# Altium PCB Altium-USBMETER-V1.5-Design-unverified.pcbdoc (part 1 of 2)
Units mm, origin at the board's own origin, x right, y up, seen from the top; angles counter-clockwise.
Board outline 73.46 x 110.88 mm, 4 copper layers (Top Layer, Inner1, Inner2, Bottom Layer); 47 components, 49 nets, 284 pads, 317 vias.
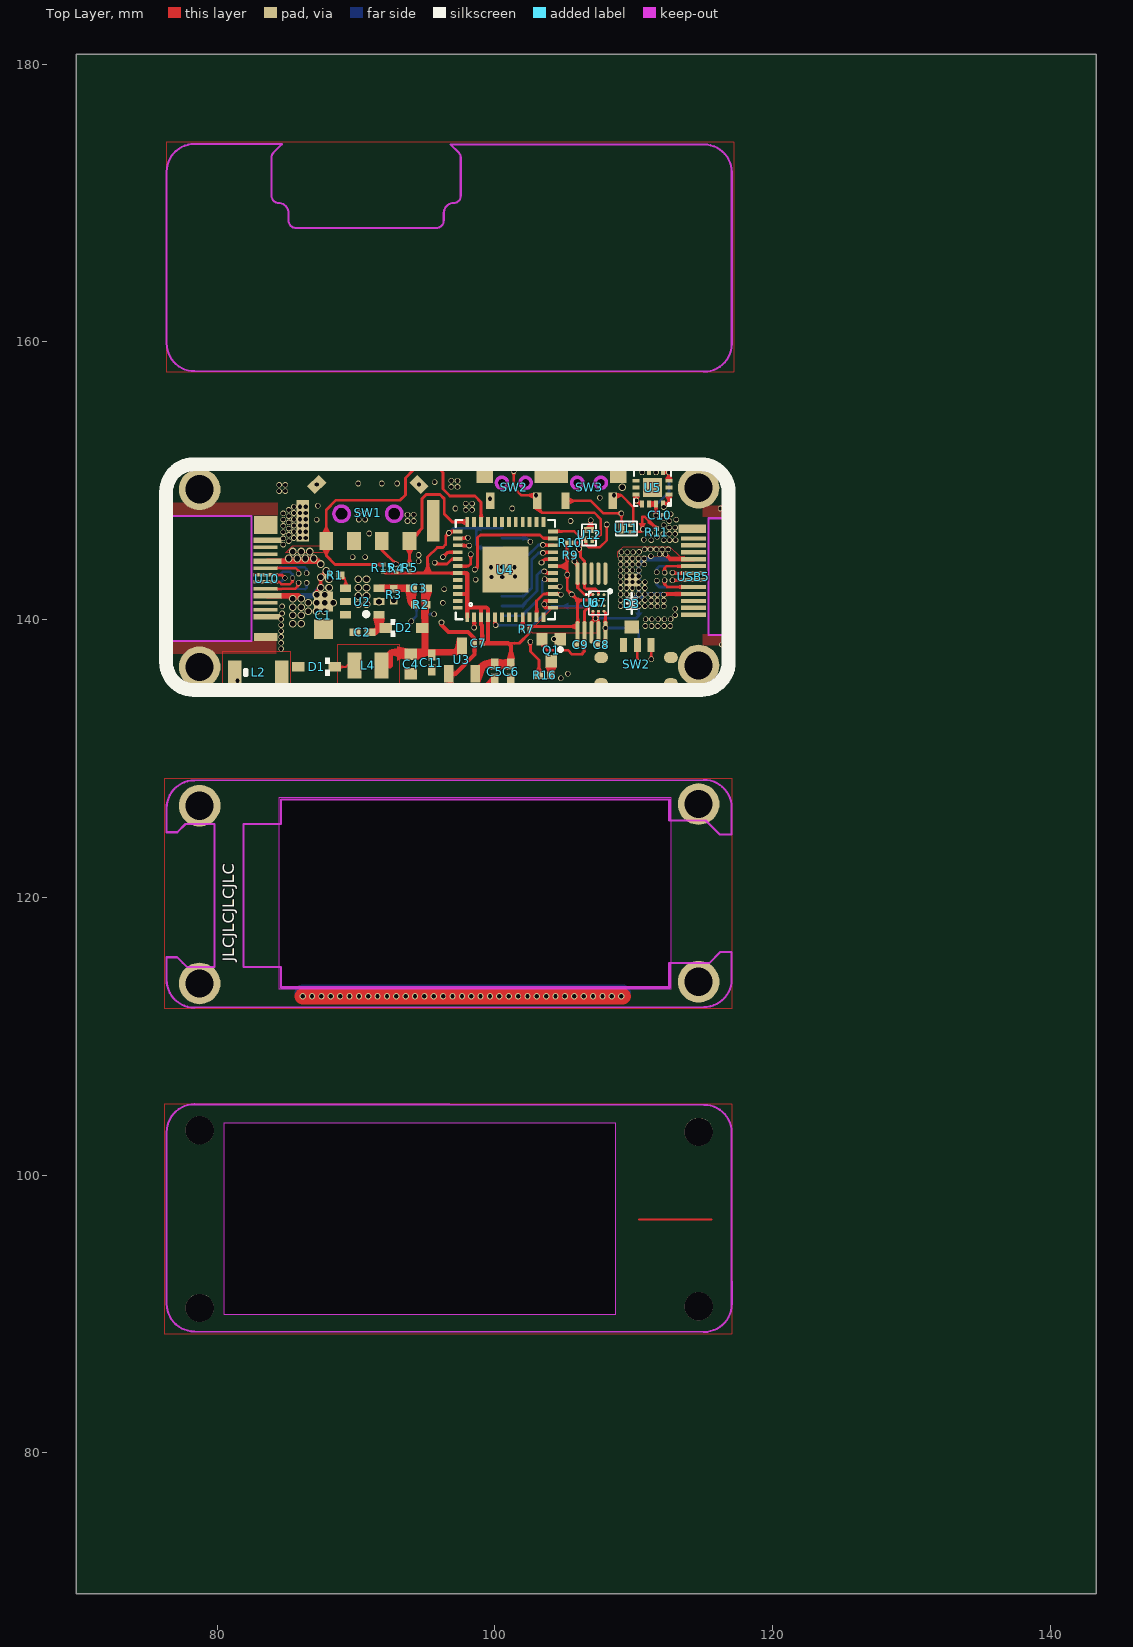
[diagram p0: Top Layer view]
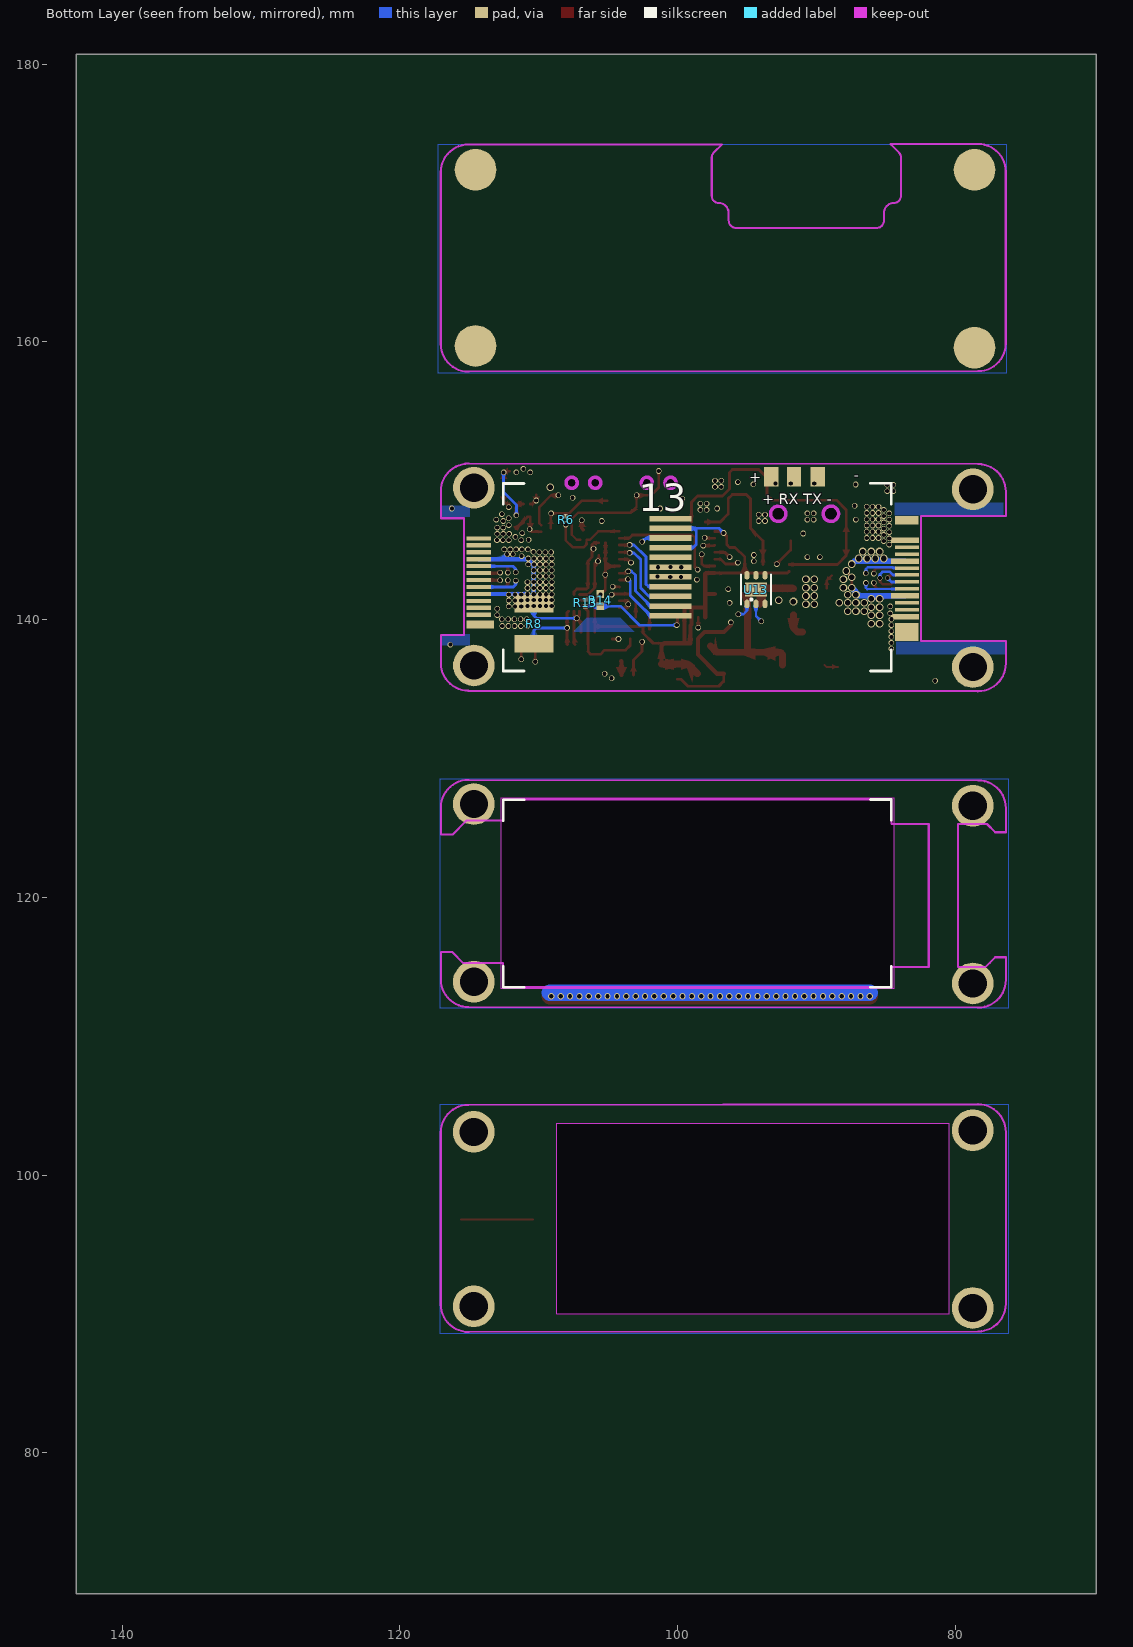
[diagram p1: Bottom Layer view, seen from below]
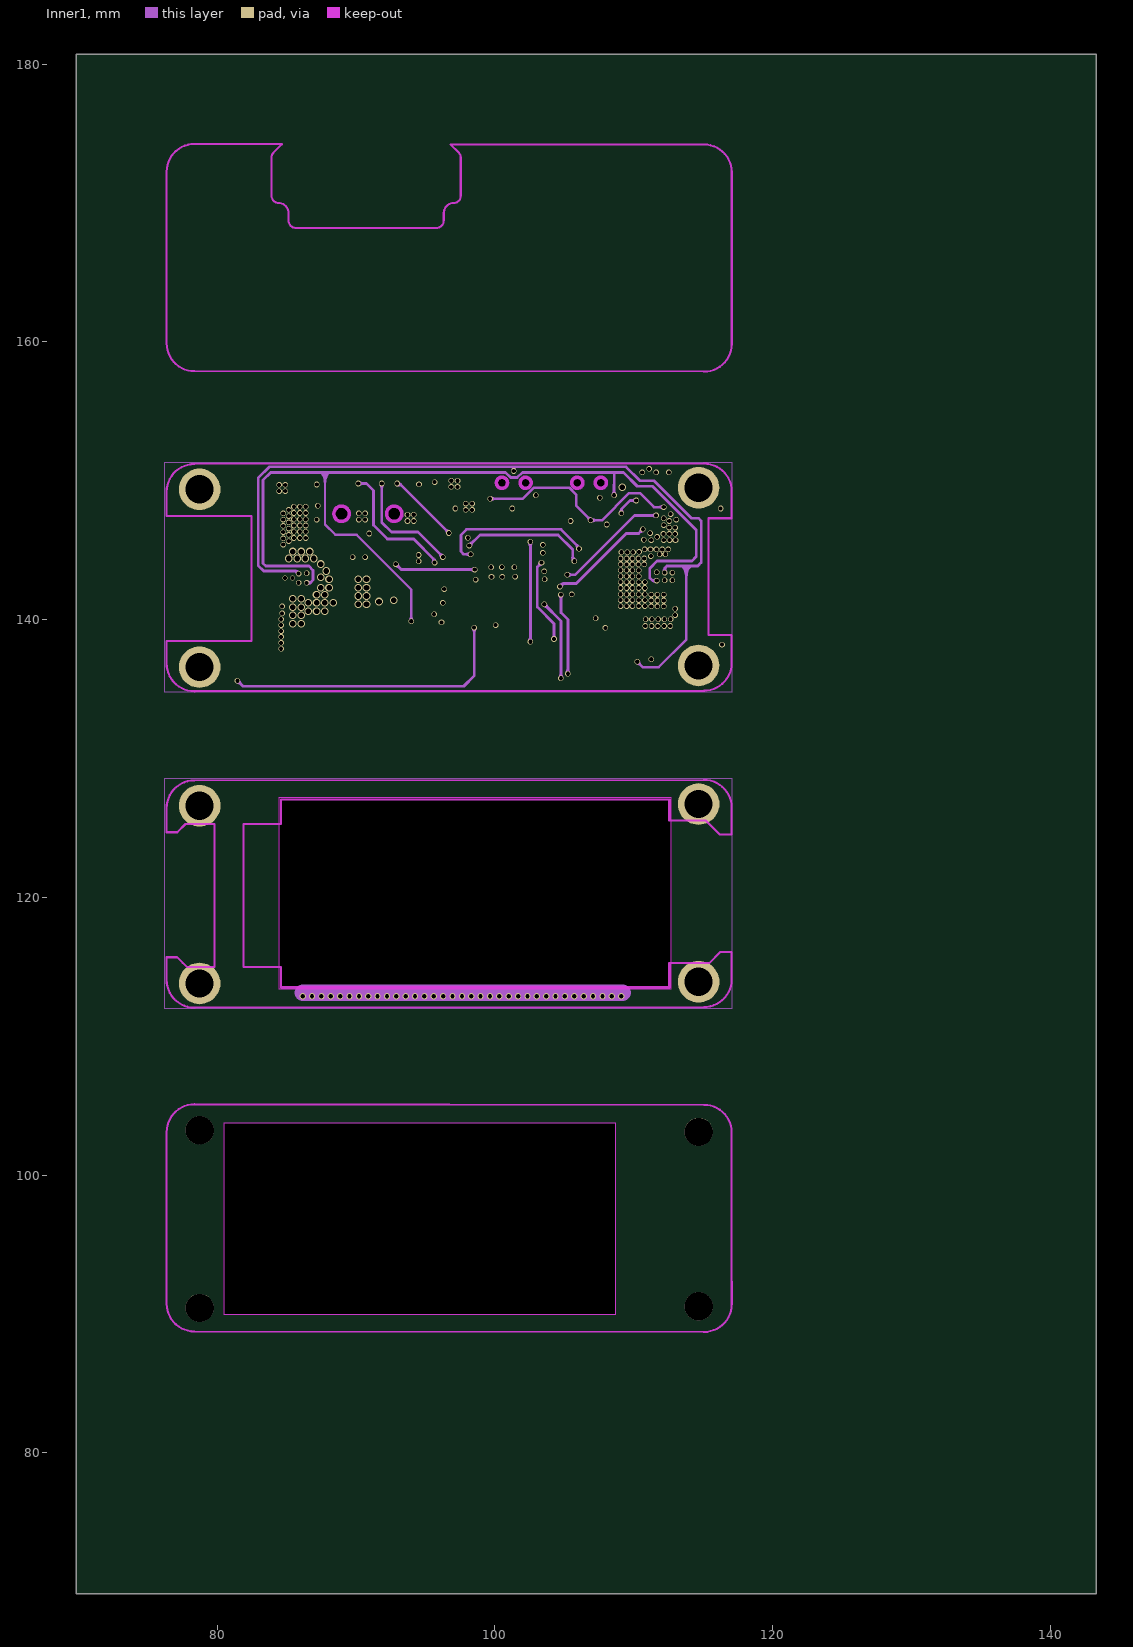
[diagram p2: Inner1]
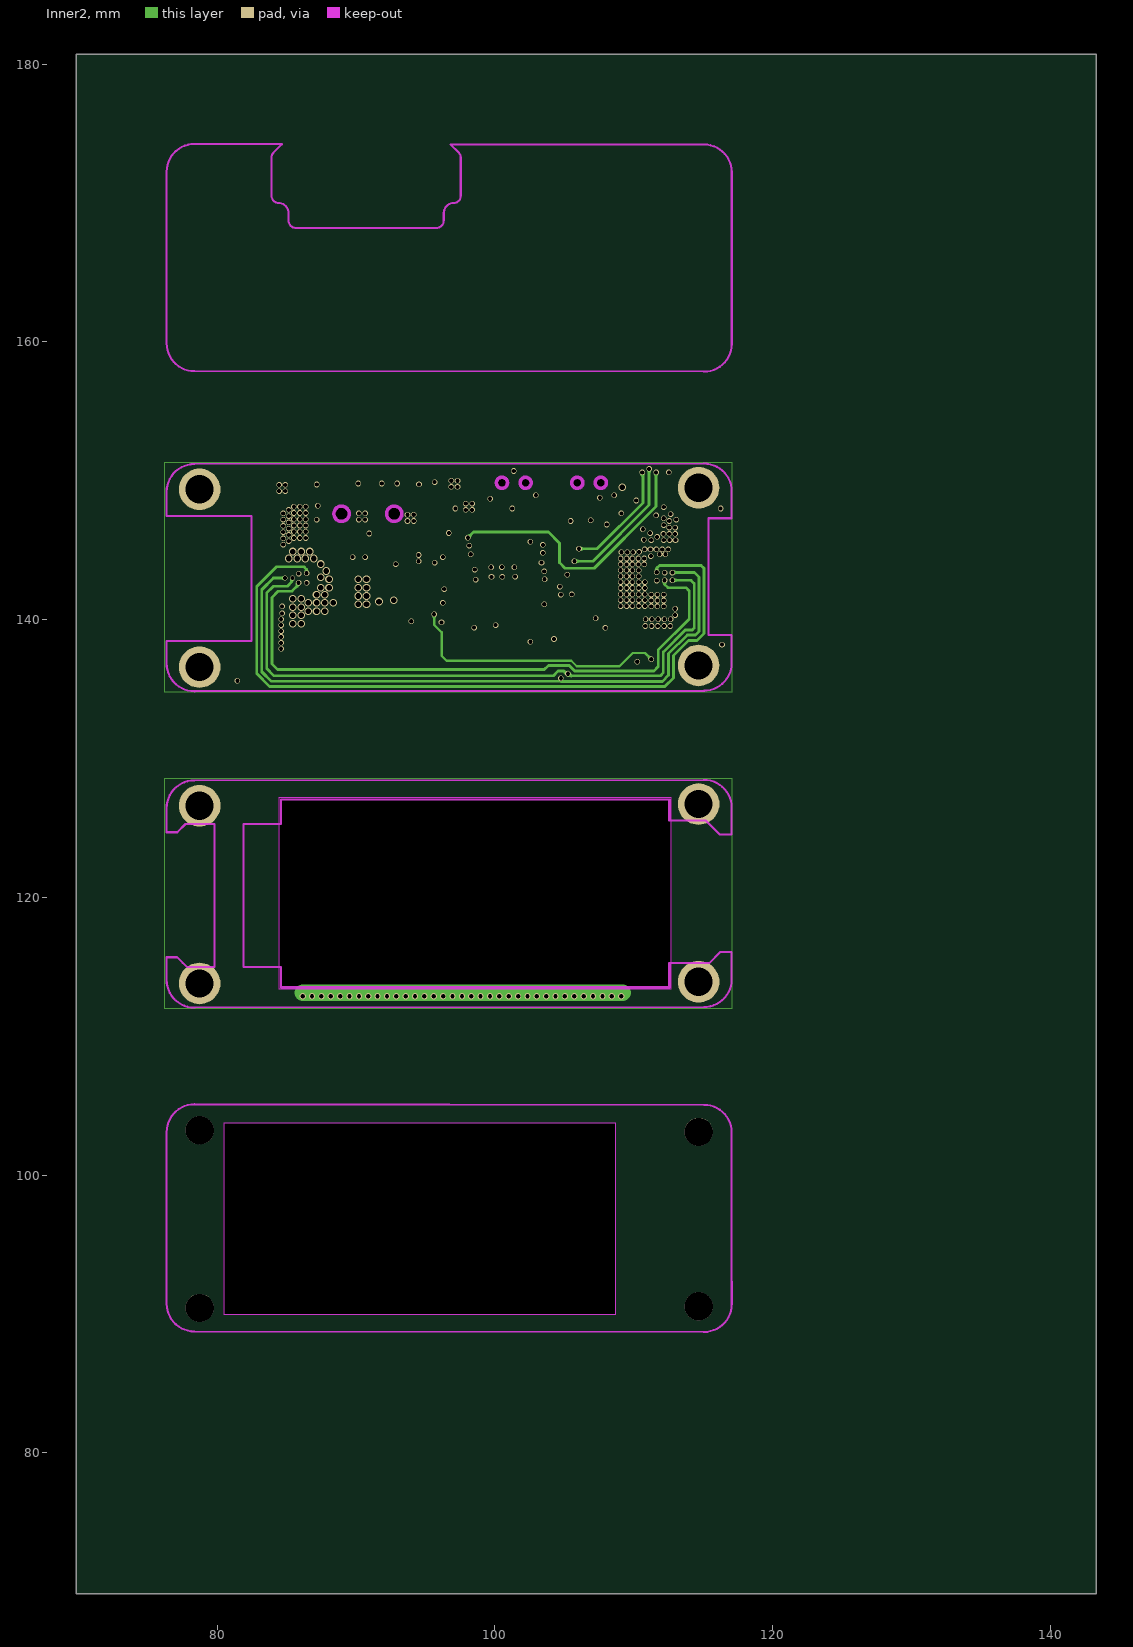
[diagram p3: Inner2]

## Layer stack, top to bottom
Top Layer: signal copper (thickness not stored)
Dielectric: dielectric 0.32, FR-4, Dk 4.8
Inner1: signal copper (thickness not stored)
Dielectric: dielectric 0.32, FR-4, Dk 4.8
Inner2: signal copper (thickness not stored)
Dielectric: dielectric 0.32, FR-4, Dk 4.8
Bottom Layer: signal copper (thickness not stored)

## Board outline
143.315,69.85 69.85,69.85 69.85,180.727 143.315,180.727
cut-out: 84.455,113.42 112.698,113.42 112.698,127.191 84.455,127.191
cut-out: 108.722,103.74 80.479,103.74 80.479,89.97 108.722,89.97

## Components (designator, comment, footprint, x,y, rotation, side; value= is the part's Value field where it differs from the comment)
C1 "22uf" C0805 87.66,140.309 r90 top
C2 "0.1u" C0402 90.46,139.109 r180 top
C3 "33pf" C0402 94.535,142.259 r180 top
C4 "22uf" C0603 93.96,136.809 r90 top
C5 "10u" C0402 100.01,136.259 r90 top
C6 "10u" C0402 101.16,136.259 r90 top
C7 "0.1u" C0201 98.81,138.309 r0 top
C8 "0.1u" C0201 107.66,138.209 r0 top
C9 "0.1u" C0201 106.16,138.209 r180 top
C10 "0.1u" C0201 111.885,147.509 r180 top
C11 "0.1u" C0402 95.46,136.909 r90 top
D1 "1N5819WS_C727116" SOD-323_L1.6-W1.3-LS2.7-RD 87.16,136.609 r180 top
D2 "1N5819WS_C727116" SOD-323_L1.6-W1.3-LS2.7-RD 93.46,139.409 r0 top
D3 "SMF26CA_C435495" SOD-123_L2.8-W1.8-LS3.7-BI 109.86,141.16 r270 top
L2 "VJ5106W240GXCMT" ANT-SMD_L3.1-W1.6 82.96,136.209 r0 top
L4 "WPN252012H100MT" IND-SMD_L2.5-W2.0_WPN252012H 90.86,136.716 r0 top
Q1 "SI1308EDL-T1-GE3" SOT-323_L2.0-W1.3-P1.30-LS2.1-BR 104.06,137.809 r90 top
R1 "500k" R0402 88.46,143.184 r180 top
R2 "27k" R0402 94.662,141.084 r180 top
R3 "8.2k" R0402 92.71,141.796 r270 top
R4 "10k" R0201 92.894,143.701 r270 top
R5 "10k" R0201 93.86,143.734 r270 top
R6 "10k" R0201 108.06,147.209 r90 bottom
R7 "10k" R0201 102.26,139.309 r180 top
R8 "r005" R1210 110.36,139.709 r90 bottom
R9 "4.7k" R0201 105.435,144.634 r180 top
R10 "4.7k" R0201 105.435,145.534 r180 top
R11 "10k" R0201 111.66,146.309 r270 top
R13 "10k" R0201 106.66,141.209 r270 bottom
R14 "10KΩ B:3453" R0402 105.56,141.409 r90 bottom
R15 "10k" R0201 91.96,143.734 r270 top
R16 "15r" R0402 103.61,136.009 r180 top
SW1 "TM-2024A" SW-SMD_TM-2024A 90.86,147.709 r0 top
SW2 "TS-1010-B-A" KEY-SMD_TX-1010-X-X 101.365,149.534 r0 top
SW2 "MINI MSK12CO2" SW-SMD_MSK12CO2 110.26,136.843 r0 top
SW3 "TS-1010-B-A" KEY-SMD_TX-1010-X-X 106.785,149.534 r0 top
U2 "MP2456GJ-Z" TSOT-23-6_L2.9-W1.6-P0.95-LS2.8-BR 90.46,141.309 r0 top
U3 "SE8533-LF" SOT-23-3_L2.9-W1.3-P1.90-LS2.4-BR 97.635,137.109 r270 top
U4 "esp32 pico d4" "ESP32 PICO D4" 100.76,143.609 r0 top
U5 "FUSB302BMPX" MLP-14_L2.5-W2.5-P0.50-BL-EP 111.36,149.509 r90 top
U6 "INA226AIDGSR" MSOP-10_L3.0-W3.0-P0.50-LS5.0-BL 106.96,141.209 r180 top
U7 "INA231BIYFDT" DSBGA-12_L1.7-W1.4-R3-C4-P0.40-BL 107.46,141.209 r270 top
U10 "TYPE-C母座短体夹板24P" "TYPE-C夹板母座 24P" 81.885,143.734 r270 top
U11 "WNM2046B-3/TR" DFN1006-3L_L1.0-W0.6-LS1.0-BR 109.474,146.572 r0 top
U12 "WNM2046B-3/TR" DFN1006-3L_L1.0-W0.6-LS1.0-BR 106.785,146.114 r270 top
U13 "TLV75801PDRVR" WSON-6_L2.0-W2.0-P0.65-TL-EP 94.361,142.17 r90 bottom
USB5 "TYPE-C-24PINMALE" USB-TYPE-C-SMD_TYPE-C-24PINMALE 114.273,143.107 r90 top

## Footprints (in the part's own frame and the unit in brackets; to place one, negate y for a bottom-side part, rotate by r counter-clockwise, add the part's x,y. Pads: shape width x height; smd on the part's side, far side on the other; paste and mask are expansions set on the pad)
ANT-SMD_L3.1-W1.6 [mm]
  rect 0.984x1.728 smd: 1(-1.692,0) 2(1.692,0)
  silkscreen extent -0.95,-0.19 -0.83,0.19
C0201 [mm]
  rect 0.368x0.324 smd: 1(-0.274,0) 2(0.274,0)
C0402 [mm]
  rect 0.79x0.54 smd: 1(-0.545,0) 2(0.545,0)
C0603 [mm]
  rect 0.8x0.9 smd: 1(-0.7,0) 2(0.7,0)
C0805 [mm]
  rect 1.41x1.35 smd: 1(-1,0) 2(1,0)
DFN1006-3L_L1.0-W0.6-LS1.0-BR [mm]
  rect 0.45x0.25 smd: 1(0.35,-0.225) 2(0.35,0.225)
  rect 0.45x0.7 smd: 3(-0.35,0)
  silkscreen extent -0.76,-0.51 0.76,0.51
DSBGA-12_L1.7-W1.4-R3-C4-P0.40-BL [mm]
  round 0.2 smd: A1(-0.6,-0.4) A2(-0.6,0) A3(-0.6,0.4) B1(-0.2,-0.4) B2(-0.2,0) B3(-0.2,0.4) C1(0.2,-0.4) C2(0.2,0) C3(0.2,0.4) D1(0.6,-0.4) D2(0.6,0) D3(0.6,0.4)
  silkscreen extent -0.85,-0.92 0.85,0.7
"ESP32 PICO D4" [mm]
  rect 0.28x0.7 smd: 1(-2.75,-3.427) 2(-2.25,-3.427) 3(-1.75,-3.427) 4(-1.25,-3.427) 5(-0.75,-3.427) 6(-0.25,-3.427) 7(0.25,-3.427) 8(0.75,-3.427) 9(1.25,-3.427) 10(1.75,-3.427) 11(2.25,-3.427) 12(2.75,-3.427) 25(2.75,3.427) 26(2.25,3.427) 27(1.75,3.427) 28(1.25,3.427) 29(0.75,3.427) 30(0.25,3.427) 31(-0.25,3.427) 32(-0.75,3.427) 33(-1.25,3.427) 34(-1.75,3.427) 35(-2.25,3.427) 36(-2.75,3.427)
  rect 0.7x0.28 smd: 13(3.428,-2.75) 14(3.428,-2.25) 15(3.428,-1.75) 16(3.428,-1.25) 17(3.428,-0.75) 18(3.428,-0.25) 19(3.428,0.25) 20(3.428,0.75) 21(3.428,1.25) 22(3.428,1.75) 23(3.428,2.25) 24(3.428,2.75) 37(-3.427,2.75) 38(-3.427,2.25) 39(-3.427,1.75) 40(-3.427,1.25) 41(-3.427,0.75) 42(-3.427,0.25) 43(-3.427,-0.25) 44(-3.427,-0.75) 45(-3.427,-1.25) 46(-3.427,-1.75) 47(-3.427,-2.25) 48(-3.427,-2.75)
  rect 3.302x3.302 smd: 49(0,0)
  silkscreen extent -3.58,-3.58 3.58,3.58
IND-SMD_L2.5-W2.0_WPN252012H [mm]
  rect 1x1.87 smd: 1(0.975,0) 2(-0.964,0)
KEY-SMD_TX-1010-X-X [mm]
  rect 0.6x1.2 smd: 1(-1.7,-0.975) 2(1.7,-0.975)
  rect 1.2x1.3 smd: 3(-2.1,0.975) 4(2.1,0.975)
  Multi-Layer board cut-out: -0.45,0.325 -0.506,0.522 -0.652,0.666 -0.85,0.719 -1.048,0.666 -1.194,0.522 -1.25,0.325 -1.25,0.325 -1.194,0.128 -1.048,-0.016 -0.85,-0.069 -0.652,-0.016 -0.506,0.128 -0.45,0.325
  Multi-Layer board cut-out: 1.25,0.325 1.194,0.522 1.048,0.666 0.85,0.719 0.652,0.666 0.506,0.522 0.45,0.325 0.45,0.325 0.506,0.128 0.652,-0.016 0.85,-0.069 1.048,-0.016 1.194,0.128 1.25,0.325
MLP-14_L2.5-W2.5-P0.50-BL-EP [mm]
  rect 0.28x0.505 smd: 1(-0.5,-1.178) 2(0,-1.178) 3(0.5,-1.178) 8(0.5,1.178) 9(0,1.178) 10(-0.5,1.178)
  rect 0.505x0.28 smd: 4(1.178,-0.75) 5(1.178,-0.25) 6(1.178,0.25) 7(1.178,0.75) 11(-1.177,0.75) 12(-1.177,0.25) 13(-1.177,-0.25) 14(-1.177,-0.75)
  rect 1.375x1.375 smd: 15(0,0)
  silkscreen extent -1.33,-1.33 1.33,1.33
MSOP-10_L3.0-W3.0-P0.50-LS5.0-BL [mm]
  oval 0.28x1.62 smd: 1(-1,-2.11) 2(-0.5,-2.11) 3(0,-2.11) 4(0.5,-2.11) 5(1,-2.11) 6(1,2.11) 7(0.5,2.11) 8(0,2.11) 9(-0.5,2.11) 10(-1,2.11)
  silkscreen extent -1.41,-0.91 -1.27,-0.77
R0201 [mm]
  rect 0.303x0.324 smd: 1(-0.242,0) 2(0.241,0)
R0402 [mm]
  rect 0.566x0.54 smd: 1(-0.433,0) 2(0.433,0)
R1210 [mm]
  rect 1.283x2.808 smd: 1(-1.441,0) 2(1.441,0)
SOD-123_L2.8-W1.8-LS3.7-BI [mm]
  rect 0.93x1.06 smd: 1(1.685,0) 2(-1.685,0)
  silkscreen extent -0.76,-0.38 0.76,0.38
SOD-323_L1.6-W1.3-LS2.7-RD [mm]
  rect 0.9x0.7 smd: 1(-1.3,0) 2(1.3,0)
  silkscreen extent -0.94,-0.64 -0.63,0.63
SOT-23-3_L2.9-W1.3-P1.90-LS2.4-BR [mm]
  rect 1.25x0.7 smd: 1(1,-0.95) 2(1,0.95) 3(-1,0)
SOT-323_L2.0-W1.3-P1.30-LS2.1-BR [mm]
  rect 0.9x0.8 smd: 1(0.8,-0.65) 2(0.8,0.65) 3(-0.8,0)
  silkscreen extent -0.09,-0.79 0.16,-0.54
SW-SMD_MSK12CO2 [mm]
  rect 0.5x1 smd: 1(-1,1.35) 2(0,1.35) 3(1,1.35)
  oval 1x0.8 smd: 4(-2.6,-1.45) 4(-2.6,0.43) 5(2.42,-1.45) 5(2.42,0.43)
SW-SMD_TM-2024A [mm]
  rect 1x1.3 smd: 1(-3,-2.03) 2(3,-2.03) 3(-1,-2.03) 4(1,-2.03)
  rect 0.9x3 smd: 5(-4.7,-0.58) 6(4.7,-0.58)
  rect 1.2x0.8 smd rot 45: 7(-3.68,2.03)
  rect 1.2x0.8 smd rot 135: 8(3.68,2.03)
  Multi-Layer board cut-out: 2.45,-0.08 2.374,0.192 2.173,0.39 1.9,0.462 1.627,0.39 1.426,0.191 1.35,-0.08 1.35,-0.08 1.426,-0.352 1.627,-0.55 1.9,-0.623 2.173,-0.55 2.374,-0.352 2.45,-0.08
  Multi-Layer board cut-out: -1.35,-0.08 -1.426,0.192 -1.627,0.39 -1.9,0.462 -2.173,0.39 -2.374,0.191 -2.45,-0.08 -2.45,-0.08 -2.374,-0.352 -2.173,-0.55 -1.9,-0.623 -1.627,-0.55 -1.426,-0.352 -1.35,-0.08
TSOT-23-6_L2.9-W1.6-P0.95-LS2.8-BR [mm]
  rect 0.8x0.532 smd: 1(1.2,-0.95) 2(1.2,0) 3(1.2,0.95) 4(-1.2,0.95) 5(-1.2,0) 6(-1.2,-0.95)
  silkscreen extent 0.12,-1.06 0.42,-0.76
"TYPE-C夹板母座 24P" [mm]
  rect 1.3x1.7 smd far side: 13(4.63,1.61)
  rect 0.6x1.7 smd: 14(4.98,1.61)
  rect 0.6x1.7 smd far side: 15(-3.44,1.61)
  rect 1.3x1.7 smd: 16(-3.09,1.61)
  rect 0.4x2 smd far side: A1(3.512,1.751) A4(2.012,1.752) A9(-0.488,1.752) A12(-1.988,1.752)
  rect 0.25x1.7 smd far side: A2(3.012,1.601) A3(2.512,1.601) A5(1.512,1.601) A6(1.012,1.601) A7(0.512,1.602) A8(0.012,1.602) A10(-0.988,1.602) A11(-1.489,1.602)
  rect 0.4x2 smd: B1(-1.988,1.751) B4(-0.488,1.752) B9(2.012,1.752) B12(3.512,1.752)
  rect 0.25x1.7 smd: B2(-1.488,1.601) B3(-0.988,1.601) B5(0.012,1.602) B6(0.512,1.602) B7(1.012,1.602) B8(1.512,1.602) B10(2.512,1.602) B11(3.012,1.602)
  Board Outline Layer lines w0.154: 5.262,-0.431 5.262,0.588 5.262,-0.431 ; -3.74,-0.428 -3.74,0.588 -3.74,-0.428 ; -0.79,0.587 -3.739,0.587 -0.79,0.587 ; 5.263,0.589 2.349,0.589 5.263,0.589
  Board Outline Layer lines w0.155: 2.349,0.587 -0.79,0.587 2.349,0.587
USB-TYPE-C-SMD_TYPE-C-24PINMALE [mm]
  rect 0.6x2 smd: 1(3.45,0.05)
  rect 0.3x1.8 smd far side: A1(-2.75,-0.05) A2(-2.249,-0.05) A3(-1.749,-0.05) A4(-1.248,-0.05) A5(-0.751,-0.05) A6(-0.25,-0.05) A7(0.25,-0.05) A8(0.751,-0.05) A9(1.251,-0.05) A10(1.751,-0.05) A11(2.25,-0.05) A12(2.75,-0.05)
  rect 0.3x1.8 smd: B1(2.75,-0.05) B2(2.25,-0.05) B3(1.75,-0.05) B4(1.251,-0.05) B5(0.751,-0.05) B6(0.25,-0.05) B7(-0.25,-0.05) B8(-0.75,-0.05) B9(-1.25,-0.05) B10(-1.749,-0.05) B11(-2.249,-0.05) B12(-2.75,-0.05)
  rect 0.6x2 smd far side: SH(-3.45,0.05)
WSON-6_L2.0-W2.0-P0.65-TL-EP [mm]
  oval 0.607x0.364 smd: 1(-1.028,0.65) 2(-1.028,0) 3(-1.028,-0.65) 4(1.028,-0.65) 5(1.028,0) 6(1.028,0.65)
  rect 1x1.6 smd: 7(0,0)
  silkscreen extent -1.08,-1.08 1.08,1.08

## Free pads (board coordinates)
  rect 1.016x1.4 smd far side: 1(89.91,150.309) 1(91.61,150.309) 1(93.26,150.309)
  round 3 smd far side: 2(78.621,159.593) 2(78.622,172.393) 2(78.746,90.436) 2(78.746,103.236) 2(114.554,159.711) 2(114.554,172.403) 2(114.679,90.554) 2(114.679,103.118)
  round 3 hole 2.032 copper offset 0,0: 2(78.741,149.388) 2(78.742,126.607) 2(114.672,136.707) 2(114.673,149.506) 2(114.673,113.925) 2(114.674,126.725)
  round 3 hole 2.032 copper offset -0.001,0.001: 2(78.741,136.587) 2(78.742,113.806)
  round 2.032 hole 2.032 copper offset 0,0: 2(78.746,103.235) 2(114.678,90.554) 2(114.678,103.118)
  round 2.032 hole 2.032 copper offset -0.001,0.001: 2(78.747,90.434)
  rect 3x0.4 smd far side: 3(100.511,140.284) 4(100.511,140.983) 5(100.511,141.684) 6(100.511,142.385) 7(100.51,143.084) 8(100.51,143.784) 9(100.51,144.484) 10(100.511,145.184) 11(100.51,145.884) 12(100.511,146.583) 13(100.51,147.284)

## Via types
v1: diameter 0.4, hole 0.3, Top Layer to Bottom Layer, 239 vias
v2: diameter 0.55, hole 0.4, Top Layer to Bottom Layer, 41 vias
v3: diameter 0.45, hole 0.31, Top Layer to Bottom Layer, 35 vias
v4: diameter 0.38, hole 0.3, Top Layer to Bottom Layer, 2 vias

## Nets (pads, with @x,y where several pads share a name; then routed paths per layer and width w, separated by ;. In a path a pad name is that pad's centre, name@x,y a point inside that pad or via, vN(x,y) a via of type N, cw(c..) or ccw(c..) an arc to the next point about the centre after c; other vN are vias at no path point)
3V3: C5.2 C6.2 C7.2 C9.2 C10.2 pad.1@93.26,150.309 pad.10 pad.12 R4.2 R5.2 R7.1 R9.2 R10.2 R14.2 R15.2 U3.2 U4.1 U4.3 U4.4 U4.19 U4.37 U4.43 U4.46 U5.3 U5.4 U5.12 U5.13 U6.6 U7.B1 | length 70.6
  Top Layer w0.2: R15.2@91.96,143.492 92.093,143.358 U4.43@97.333,143.359 ; 95.242,143.359 95.16,143.44 95.16,144.509 95.86,145.209 96.26,145.209 96.46,145.409 96.46,146.009 v1(96.696,146.244) ; v1(96.696,146.244) 96.81,146.36 U4.37@97.333,146.359 ; 100.96,138.308 101.76,138.308 102.502,139.05 R7.1@102.502,139.309 102.502,139.51 U6.6@105.961,139.51 ; U4.19@104.188,143.859 105.194,143.858 ; R10.2@105.194,145.534 R9.2@105.194,144.634 105.21,144.617 v1(105.21,143.234) ; v1(105.21,143.234) 105.21,142.161 v1(105.545,141.826) 105.961,141.409 ; U6.6@105.96,139.099 U6.6@105.961,139.51 ; U7.B1@107.06,141.409 105.961,141.409 ; U5.12@111.11,148.331 U5.13@111.61,148.331 v1(111.611,147.509) ; U5.4@112.11,150.686 112.459,150.686 v1(112.535,150.609) 112.535,150.012 U5.3@112.538,150.009 ; U6.6@105.961,139.51 105.961,141.409
  Top Layer w0.3: U4.46@97.333,141.859 97.96,141.859 98.011,141.808 98.011,140.884 ; U4.43@97.333,143.359 97.96,143.358 98.011,143.309 98.011,141.486 ; U4.1@98.011,140.18 98.011,140.884 ; 98.781,140.884 99.009,140.884 ; C6.2@101.16,136.804 101.161,138.107 100.96,138.308 99.507,138.308 ; 98.011,140.884 99.009,140.884 ; 99.009,140.884 99.009,140.18 99.009,139.659 99.086,139.583 C7.2@99.084,138.309 99.507,138.308 ; 99.009,140.884 99.385,140.884 99.51,140.759 99.51,140.18 99.507,138.308
  Top Layer w0.5: U3.2@98.585,136.109 99.281,136.804 C5.2@100.01,136.804 C6.2@101.16,136.804
  Inner1 w0.2: v1@92.96,149.809 93.131,149.809 v1(96.696,146.244) ; v1(105.21,143.234) 105.786,143.233 110.061,147.508 v1(111.611,147.509)
  Bottom Layer w0.2: v1(96.696,146.244) 97.036,146.583 pad.12@100.511,146.583 98.834,146.583 98.659,146.408 98.659,145.41 98.885,145.184 pad.10@100.511,145.184 ; v1(111.611,147.509) 111.611,148.259 112.535,149.184 v1(112.535,150.609)
  other v1: 92.96,149.809
5V: C3.1 C4.2 C11.2 D2.2 L4.1 R2.1 U3.3 | length 12
  Top Layer w0.254: R2.1@94.968,141.084 95.08,141.196 C3.1@95.08,142.259
  Top Layer w0.5: 92.433,136.733 92.433,137.48 92.611,137.658 97.183,137.658 U3.3@97.635,138.107 ; 94.968,137.683 94.968,141.084 94.968,142.146 C3.1@95.08,142.259
302INT: U4.38 U5.5 | length 20.7
  Top Layer w0.2: U4.38@97.333,145.859 98.011,145.86 v1(98.059,145.908)
  Inner2 w0.2: v1(98.059,145.908) 98.461,146.309 103.861,146.309 104.661,145.509 104.661,144.109 105.06,143.708 107.16,143.708 111.61,148.158 v1(111.61,150.609)
BL: Q1.1 U4.20 | length 7.5
  Top Layer w0.2: v1(103.36,144.109) 103.609,144.358 U4.20@104.188,144.359 ; v1(104.26,138.609) Q1.1@104.71,138.609
  Inner1 w0.2: v1(103.36,144.109) 103.06,143.809 103.06,140.909 104.26,139.709 v1(104.26,138.609)
CC1: SW3.2 U10.A5 U11.2 U13.2 USB5.A5 | length 78.1
  Top Layer w0.172: v1(108.585,148.959) 109.111,148.958 109.959,148.11 109.959,146.932 U11.2@109.824,146.797
  Inner1 w0.172: 87.774,150.609 87.774,146.859 88.519,146.114 90.043,146.114 93.98,142.177 v1(93.98,139.891)
  Inner1 w0.2: v1(86.441,142.65) 86.706,142.652 86.911,142.857 86.911,143.556 86.607,143.861 83.508,143.861 83.312,144.056 83.312,150.061 83.861,150.609 87.774,150.609 100.767,150.609 101.143,150.233 101.61,150.233 101.986,150.609 109.258,150.609 110.259,149.609 111.359,149.609 114.506,146.464 114.506,144.554 114.186,144.234 111.687,144.234 111.161,143.708 111.161,143.01 111.351,142.817 v1(111.663,142.817) ; v1(108.585,148.959) 108.593,150.609
  Bottom Layer w0.172: v1(93.98,139.891) 94.361,140.272 U13.2@94.361,141.142
  Bottom Layer w0.18: U10.A5@83.488,142.22 86.34,142.199 86.442,142.298 v1(86.441,142.65)
  Bottom Layer w0.2: v1@111.661,142.817 111.661,142.535 111.842,142.354 USB5.A5@114.323,142.354
CC1G: SW3.1 U5.10 U5.11 U11.3 | length 8.1
  Top Layer w0.172: v1(109.11,147.659) 109.124,147.645 U11.3@109.124,146.572
  Top Layer w0.19: SW3.1@105.085,148.559 106.911,148.56 107.811,147.658 v1(109.11,147.659) ; U5.10@110.183,149.009 v1(110.183,148.586) 110.437,148.331 U5.11@110.61,148.331
  Inner1 w0.19: v1(109.11,147.659) 109.11,147.959 109.738,148.586 v1(110.183,148.586)
CC2: SW2.2 U10.B5 U12.2 USB5.B5 | length 76.5
  Top Layer w0.172: SW2.2@102.959,148.958 102.959,148.11 103.36,147.709 107.16,147.709 107.621,147.248 107.621,146.122 107.262,145.764 U12.2@107.01,145.764 ; v1(110.26,136.967) SW2.2@110.26,138.039
  Top Layer w0.18: U10.B5@83.485,143.721 85.667,143.721 85.87,143.52 v1(85.871,143.32)
  Top Layer w0.2: v1@101.359,150.708 101.359,149.51 101.91,148.958 SW2.2@102.959,148.958 ; v1(112.223,143.397) 112.223,143.706 112.372,143.855 USB5.B5@114.323,143.855
  Inner1 w0.172: v1(110.26,136.967) 110.638,136.589 111.804,136.589 113.792,138.577 113.792,143.857
  Inner1 w0.2: v1(85.871,143.32) 85.682,143.508 83.361,143.508 82.959,143.909 82.959,150.208 83.759,151.008 109.459,151.008 110.46,150.01 111.461,150.01 114.161,147.31 114.661,147.31 114.859,147.109 114.859,144.109 114.61,143.858 112.385,143.858 112.235,143.708 v1(112.223,143.397) ; v1(101.36,150.709) 101.36,150.98 101.388,151.008
  other v1: 102.96,148.959
CC2G: SW2.1@99.665,148.559 U5.1 U5.14 U12.3 | length 17.2
  Top Layer w0.2: U5.14@112.11,148.331 112.332,148.331 112.538,148.537 U5.1@112.538,149.009
  Top Layer w0.254: U12.3@106.785,146.464 106.91,146.588 v1(106.91,147.159)
  Inner1 w0.19: v1(99.66,148.709) 102.009,148.709 102.809,149.51 105.359,149.51 105.86,149.009 ; 105.86,149.009 105.86,148.209 106.91,147.159 107.71,147.159 109.66,149.109 110.46,149.109 111.46,148.109 v1(112.16,148.109)
CLK: pad.4 U4.18 | length 5.4
  Top Layer w0.19: v1(103.56,143.484) 103.686,143.358 U4.18@104.188,143.359
  Bottom Layer w0.2: pad.4@100.511,140.983 101.958,140.983 103.035,142.06 103.035,143.208 103.31,143.485 v1(103.56,143.484)
DC: pad.5 U4.21 | length 6.2
  Top Layer w0.19: v1(103.46,144.809) 103.51,144.859 U4.21@104.188,144.859
  Bottom Layer w0.2: pad.5@100.511,141.684 102.06,141.684 102.659,142.283 102.659,144.333 103.134,144.808 v1(103.46,144.809)
DM: U4.11 U4.15 U10.A7 U10.B7 USB5.B7 | length 61.9
  Top Layer w0.18: U10.B7@83.488,142.72 84.468,142.72 84.636,142.555 85.248,142.555 85.431,142.738 v4(85.431,143)
  Top Layer w0.2: U4.11@103.01,140.18 103.01,141.359 103.51,141.859 U4.15@104.188,141.859 104.709,141.859 v1(104.76,141.809) ; v1@112.781,142.837 114.303,142.837 USB5.B7@114.323,142.855
  Inner1 w0.2: v1(104.76,141.809) 104.76,140.509 105.26,140.009 v1(105.26,136.109)
  Inner2 w0.2: v4(85.431,143) 85.36,142.929 85.36,142.709 85.06,142.409 84.06,142.409 83.568,141.916 83.568,136.501 84.11,135.959 104.21,135.959 104.56,136.309 104.96,136.309 105.31,135.959 106.703,135.959 111.91,135.959 112.136,136.185 112.136,137.683 113.714,139.261 114.214,139.261 114.354,139.4 114.354,142.616 114.133,142.837 v1(112.783,142.837) ; v1(105.26,136.109) 105.41,135.959 105.461,135.959
  Bottom Layer w0.18: U10.A7@83.488,143.22 84.493,143.22 84.712,143.439 85.25,143.439 85.431,143.259 v4(85.431,143)
DP: U4.13 U4.14 U10.A6 U10.B6 USB5.B6 | length 60.6
  Top Layer w0.18: U10.B6@83.485,143.223 84.669,143.223 v4@84.89,143
  Top Layer w0.2: U4.13@104.188,140.859 103.609,140.858 103.561,140.909 v1(103.56,141.11) 103.561,141.308 103.609,141.359 U4.14@104.188,141.359 ; v1@112.781,143.396 112.822,143.355 USB5.B6@114.323,143.355
  Inner1 w0.2: v1(103.56,141.11) 104.76,139.91 v1(104.76,135.784)
  Inner2 w0.2: v4@84.89,143 84.051,143 83.213,142.161 83.213,136.256 83.907,135.562 104.76,135.562 v1(104.76,135.784) 104.76,135.56 112.063,135.56 112.507,136.004 112.507,137.556 113.861,138.908 114.46,138.908 114.707,139.154 114.707,143.063 114.371,143.396 v1(112.783,143.397)
  Bottom Layer w0.18: U10.A6@83.485,142.723 84.613,142.723 v4@84.89,143
  other v4: 84.891,143
FB: C3.2 R2.2 R3.1 U2.3 | length 3.5
  Top Layer w0.5: U2.3@91.66,142.259 C3.2@93.99,142.259 93.99,141.196 R2.2@94.102,141.084
G: pad.2@78.622,172.393 pad.2@78.742,113.806 pad.2@78.742,126.607 pad.2@78.746,90.436 pad.2@78.746,103.235 pad.2@78.746,103.236 pad.2@78.747,90.434 pad.2@114.554,172.403 pad.2@114.673,113.925 pad.2@114.674,126.725 pad.2@114.678,90.554 pad.2@114.678,103.118 pad.2@114.679,90.554 pad.2@114.679,103.118
GND: C1.1 C4.1 C5.1 C6.1 C7.1 C9.1 C10.1 C11.1 D1.2 D3.1 pad.2@78.621,159.593 pad.2@78.741,136.587 pad.2@78.741,149.388 pad.2@114.554,159.711 pad.2@114.672,136.707 pad.2@114.673,149.506 pad.7 pad.8 pad.13 Q1.2 R3.2 R6.2 R11.2 R13.1 SW1.3 SW1.5 SW1.6 SW1.7 SW1.8 SW2.3@99.265,150.509 SW2.4 SW2.5 SW3.3 SW3.4 U2.2 U3.1 U4.49 U5.8 U5.9 U5.15 U6.1 U6.2 U6.7 U7.B3 U7.C1 U7.C3 U10.13 U10.14 U10.15 U10.16 U10.A1 U10.A12 U10.B1 U10.B12 U13.4 U13.5 U13.6 U13.7 USB5.1 USB5.A1 USB5.A12 USB5.B1 USB5.B12 USB5.SH | length 18.8
  Top Layer w0.2: U3.1@96.685,136.109 U3.1@96.685,135.583 ; C5.1@100.01,135.714 99.766,135.715 99.261,135.209 97.061,135.209 ; Q1.2@103.41,138.609 103.411,138.158 103.759,137.808 105.26,137.808 105.56,137.508 106.261,137.508 106.459,137.709 106.434,137.734 C9.1@106.434,138.209 106.459,138.234 U6.7@106.46,139.099 106.459,140.609 106.861,141.008 U7.C1@107.06,141.009 ; U3.1@96.685,135.583 97.061,135.209 ; U3.1@96.685,135.583 96.685,135.56 97.036,135.209 97.061,135.209
  Top Layer w0.3: v1(96.16,139.809) 96.16,139.609 96.66,139.108 98.06,139.108 98.537,138.633 C7.1@98.536,138.309 98.537,137.485 97.16,136.108 U3.1@96.685,136.109
  other v1: 84.609,137.909 116.36,138.209 84.61,138.334 84.61,138.759 84.61,139.184 110.836,139.547 111.287,139.547 111.736,139.547 112.186,139.547 112.636,139.547 84.61,139.609 84.61,140.034 110.86,140.034 111.31,140.034 111.76,140.034 112.21,140.034 112.66,140.034 112.985,140.334 84.685,140.459 112.985,140.784 84.685,140.959 96.26,141.209 96.36,142.209 98.61,142.884 99.76,143.084 100.535,143.084 101.46,143.109 99.735,143.784 100.51,143.784 101.41,143.784 94.51,144.209 89.76,144.509 90.66,144.509 94.51,144.659 84.76,145.409 85.16,145.659 111.26,145.734 112.16,145.734 112.585,145.734 113.01,145.734 110.735,145.759 84.76,145.859 85.535,145.884 85.96,145.884 86.385,145.884 111.685,145.959 85.16,146.109 112.135,146.184 112.56,146.184 112.985,146.184 90.96,146.209 111.185,146.234 84.76,146.309 85.535,146.334 85.96,146.334 86.385,146.334 85.16,146.559 112.56,146.634 112.985,146.634 84.76,146.759 85.535,146.784 85.96,146.784 86.385,146.784 112.16,146.809 85.16,147.009 93.71,147.109 94.16,147.109 105.46,147.109 112.56,147.109 84.76,147.209 87.16,147.209 90.21,147.209 90.66,147.209 113.06,147.209 85.535,147.234 85.96,147.234 86.385,147.234 112.16,147.309 85.16,147.459 93.71,147.559 94.16,147.559 112.66,147.609 84.76,147.659 90.21,147.659 90.66,147.659 85.535,147.684 85.96,147.684 86.385,147.684 85.16,147.909 97.91,147.909 98.36,147.909 97.16,148.009 101.26,148.009 116.26,148.009 85.535,148.134 85.96,148.134 86.385,148.134 87.26,148.209 97.91,148.359 98.36,148.359 107.569,148.781 84.46,149.259 84.91,149.259 96.86,149.559 97.31,149.559 84.46,149.709 84.91,149.709 87.18,149.739 94.54,149.739 95.66,149.909 96.86,150.009 97.31,150.009
  other v2: 90.16,141.109 90.76,141.109 91.66,141.309 92.71,141.401 90.16,141.709 90.76,141.709 90.16,142.309 90.76,142.309 90.16,142.909 90.76,142.909 109.185,149.548
IN+: C8.1 D3.2 R8.2 U6.8 U6.9 U7.D1 U7.D2 USB5.A4 USB5.A9 USB5.B4 USB5.B9 | length 25.7
  Top Layer w0.2: U6.8@106.96,139.099 106.96,139.809 v1(107.26,140.109) 107.46,139.908 U6.9@107.46,139.099 107.46,138.283 C8.1@107.386,138.209 ; U7.D1@107.06,140.609 107.06,140.309 v1(107.26,140.109) 107.46,140.309 U7.D2@107.46,140.609
  Top Layer w0.3: v1@112.159,141.811 112.207,141.857 USB5.B9@114.323,141.857 ; v1(112.285,144.709) 112.637,144.358 USB5.B4@114.323,144.358
  Bottom Layer w0.2: v1(107.26,140.109) 110.16,140.109 110.361,140.31 v1(110.36,140.985) ; v1@107.26,140.009 v1(107.26,140.109) ; v1(109.91,140.985) R8.2@110.31,140.985
  Bottom Layer w0.3: v1@112.159,141.811 v1@112.207,141.859 ; v1(112.285,144.709) 112.637,144.358 ; USB5.A4@114.323,141.858 v1@112.207,141.859 ; USB5.A9@114.323,144.358 112.637,144.358 ; v1@112.207,141.859 110.785,141.859 v1(109.91,140.985) 109.911,141.384 110.361,141.834 110.36,142.284 v1(110.36,142.71) v1(110.36,143.135) 110.361,143.96 v1(110.335,143.984) 110.439,143.985 110.81,144.358 112.637,144.358
  other v1: 111.26,140.96 111.71,140.96 112.16,140.96 109.06,140.985 109.485,140.985 110.81,140.985 111.26,141.385 111.71,141.385 112.16,141.385 109.06,141.409 109.485,141.409 109.91,141.409 110.36,141.41 110.81,141.41 111.26,141.81 111.71,141.81 112.16,141.81 109.06,141.835 109.485,141.835 109.91,141.835 110.36,141.835 110.81,141.835 109.06,142.285 109.485,142.285 109.91,142.285 110.36,142.285 110.81,142.285 109.06,142.709 109.485,142.709 109.91,142.709 110.81,142.71 109.06,143.134 109.485,143.134 109.91,143.134 109.06,143.559 109.485,143.559 109.91,143.559 110.36,143.56 109.06,143.984 109.485,143.984 109.91,143.984 110.76,143.984 109.06,144.409 109.485,144.409 109.91,144.409 110.335,144.409 110.76,144.409 111.235,144.584 111.86,144.709 109.11,144.859 109.535,144.859 109.96,144.859 110.385,144.884 110.785,145.059 111.21,145.059 111.635,145.059 112.06,145.059 112.485,145.059
IN-: C1.2 C8.2 R1.2 R8.1 U2.5 U6.10 U7.D3 U10.A4 U10.A9 U10.B4 U10.B9 | length 23
  Top Layer w0.2: C1.2@87.061,141.91 v2(87.46,142.309) v2(87.46,143.059) 87.861,143.459 v2@87.861,143.508 ; U7.D3@107.86,140.609 107.96,140.508 v1(107.96,139.409) U6.10@107.96,139.099 107.96,138.234 C8.2@107.934,138.209
  Top Layer w0.3: v2@85.573,144.221 v2(85.76,144.409)
  Top Layer w0.4: U10.B9@83.637,141.722 85.847,141.722 v2(86.06,141.509) ; U10.B4@83.637,144.222 85.573,144.221 87.247,144.221 v2(87.46,144.009)
  Bottom Layer w0.2: v1(107.96,139.409) 108.059,139.408 110.16,139.408 110.361,139.21 R8.1@110.36,138.267
  Bottom Layer w0.3: v2@85.573,144.221 v2(85.76,144.409) ; 85.847,141.722 v2(86.06,141.509)
  Bottom Layer w0.4: U10.A4@83.637,141.722 85.847,141.722 86.873,141.722 v2(87.46,142.309) ; U10.A9@83.637,144.222 85.573,144.221 87.247,144.221 v2(87.46,144.009)
  other v2: 85.46,139.709 86.06,139.709 85.46,140.309 86.06,140.309 86.56,140.609 87.16,140.609 87.76,140.609 85.46,140.909 86.06,140.909 86.56,141.209 87.16,141.209 87.76,141.209 88.36,141.209 85.46,141.509 87.16,141.809 87.76,141.809 88.06,142.309 88.06,142.909 87.86,143.509 85.16,144.409 86.36,144.409 86.96,144.409 85.46,144.909 86.06,144.909 86.66,144.909
IO0: R4.1 SW1.4 U4.23 | length 16
  Top Layer w0.2: SW1.4@91.86,145.678 91.859,145.026 R4.1@92.911,143.975 ; v1(98.56,143.609) 98.761,143.81 98.761,145.908 98.961,146.108 103.261,146.108 103.51,145.86 U4.23@104.188,145.859
  Inner1 w0.2: v1(92.86,144.009) 93.26,143.609 v1(98.56,143.609)
L2_2: L2.2
LED-: pad.11 R16.2 | length 14.2
  Top Layer w0.2: v1(102.56,138.409) 102.56,137.709 103.178,137.091 R16.2@103.177,136.009
  Inner1 w0.2: v1(102.56,138.409) v1(102.56,145.609)
  Bottom Layer w0.2: 102.286,145.882 v1(102.56,145.609) 102.286,145.882 ; 102.286,145.882 100.511,145.882 102.286,145.882
LNA: L2.1 U4.2 | length 21.7
  Top Layer w0.2: v1(98.51,139.434) U4.2@98.512,140.18
  Inner1 w0.2: v1(81.46,135.609) 81.86,135.209 97.76,135.209 98.51,135.959 v1(98.51,139.434)
MOSI: pad.3 U4.17 | length 5.4
  Top Layer w0.19: v1(103.585,142.909) 103.635,142.86 U4.17@104.188,142.859
  Bottom Layer w0.2: pad.3@100.511,140.284 101.961,140.284 103.411,141.735 103.411,142.735 v1@103.584,142.908
NTC: R13.2 R14.1 U4.5 | length 7.8
  Top Layer w0.2: U4.5@100.01,140.18 100.01,139.659 v1(100.06,139.609)
  Bottom Layer w0.2: v1(100.06,139.609) 102.761,139.609 104.128,140.975 R14.1@105.56,140.976 R13.2@106.66,140.967
Q1_3: Q1.3 R16.1 | length 1
  Top Layer w0.3: R16.1@104.043,136.009 104.044,136.992 Q1.3@104.059,137.008
R7_2: R7.2 U4.9 | length 0.9
  Top Layer w0.2: U4.9@102.009,140.18 102.019,140.172 R7.2@102.019,139.309
RES: pad.6 U4.22 | length 6.1
  Top Layer w0.2: v1(103.46,145.384) U4.22@104.211,145.385
  Bottom Layer w0.2: pad.6@100.511,142.385 102.111,142.385 102.286,142.558 102.286,144.536 103.134,145.385 v1(103.46,145.384)
RX: pad.1@91.61,150.309 U4.40 | length 9.5
  Top Layer w0.2: v1(96.26,144.509) 96.609,144.859 U4.40@97.333,144.859
  Inner1 w0.2: v1@91.86,149.809 91.86,147.009 92.56,146.309 94.46,146.309 v1(96.26,144.509)
  other v1: 91.86,149.809
RX1+: U10.A11
RX1-: U10.A10
RX2+: U10.B11
RX2-: U10.B10
SCL: R9.1 U4.39 U5.6 U6.5 U7.A1 | length 23.4
  Top Layer w0.2: U4.39@97.333,145.359 97.358,145.334 v1(98.16,145.334) ; R9.1@105.677,144.634 105.677,144.267 v1(105.735,144.209) 105.761,144.209 105.961,144.008 U6.5@105.96,143.319 105.961,142.309 106.459,141.808 U7.A1@107.06,141.809
  Inner1 w0.2: v1(98.16,145.334) 98.935,146.109 104.56,146.109 105.609,145.06 105.609,144.335 v1(105.735,144.209)
  Inner2 w0.2: v1(105.735,144.209) 107.061,144.209 111.11,148.26 v1(111.11,150.859)
SDA: R10.1 U4.42 U5.7 U6.4 U7.A2 | length 26.3
  Top Layer w0.2: U4.42@97.333,143.859 98.11,143.858 98.26,144.008 v1(98.26,144.709) ; R10.1@105.677,145.534 106.035,145.534 106.16,145.41 106.16,144.508 106.459,144.209 U6.4@106.46,143.319 106.459,142.309 106.561,142.21 107.259,142.21 107.46,142.009 U7.A2@107.46,141.809
  Top Layer w0.254: v1(110.61,150.609) U5.7@110.61,150.686
  Inner1 w0.2: v1(98.26,144.709) 97.76,144.709 97.559,144.91 97.559,146.108 97.96,146.51 104.76,146.51 106.061,145.209 v1(106.06,145.109)
  Inner2 w0.2: v1(106.06,145.109) 107.358,145.108 110.66,148.41 110.66,150.559 v1(110.61,150.609)
SUB1: U10.A8 USB5.A8 | length 60.8
  Inner2 w0.2: v1(86.441,143.35) 86.442,143.629 86.261,143.81 84.26,143.81 82.86,142.408 82.86,136.108 83.785,135.184 112.235,135.184 112.86,135.809 112.86,137.409 113.96,138.509 114.559,138.509 115.06,139.009 115.06,143.708 114.859,143.909 111.859,143.909 111.664,143.711 v1(111.663,143.417)
  Bottom Layer w0.18: U10.A8@83.488,143.721 84.463,143.721 84.519,143.779 86.312,143.779 86.442,143.65 v1(86.441,143.35)
  Bottom Layer w0.2: v1@111.661,143.416 111.661,143.647 111.872,143.855 USB5.A8@114.323,143.855
SUB2: U10.B8 USB5.B8 | length 49.4
  Top Layer w0.18: U10.B8@83.485,142.222 85.611,142.222 85.87,142.479 v1(85.871,142.66)
  Top Layer w0.2: v1(112.223,142.837) 112.223,142.555 112.423,142.357 USB5.B8@114.323,142.356
  Inner2 w0.2: v1(85.871,142.66) 85.87,142.519 85.405,142.055 84.407,142.055 83.96,141.608 83.96,136.81 84.361,136.408 103.561,136.408 103.861,136.708 105.359,136.708 105.756,136.312 111.463,136.312 111.76,136.609 111.76,137.808 114.001,140.048 114.001,142.07 113.759,142.309 112.461,142.309 112.223,142.547 v1(112.223,142.837)
SW1: R5.1 SW1.2 U4.36 | length 9.9
  Top Layer w0.2: R5.1@93.86,143.975 SW1.2@93.86,145.678 94.76,146.578 94.76,148.709 95.06,149.009 96.061,149.009 96.36,148.709 96.36,147.61 96.932,147.036 U4.36@98.01,147.036
SW2: R15.1 SW1.1 U4.34 | length 23.8
  Top Layer w0.2: R15.1@91.96,143.975 88.494,143.975 87.861,144.61 SW1.1@87.86,145.678 87.861,147.909 88.56,148.608 93.185,148.608 93.561,148.984 93.561,150.208 94.161,150.807 96.061,150.807 96.261,150.609 96.261,149.408 96.762,148.908 98.56,148.908 99.009,148.458 U4.34@99.01,147.036
SW4: R11.1 U4.16 U11.1 | length 11.4
  Top Layer w0.172: U11.1@109.824,146.347 110.498,146.347 v1(110.66,146.509)
  Top Layer w0.2: U4.16@104.188,142.359 v1(104.685,142.384) ; v1(110.66,146.509) 110.61,146.558 110.61,147.409 110.803,147.409 R11.1@111.66,146.55
  Inner1 w0.2: v1(104.685,142.384) 104.91,142.609 105.86,142.609 109.46,146.209 110.36,146.209 v1(110.66,146.509)
SW5: R6.1 U4.24 U12.1 | length 6
  Top Layer w0.172: U4.24@104.188,146.359 105.722,146.359 106.317,145.764 U12.1@106.56,145.764 106.56,145.412 106.747,145.225 107.569,145.225 108.059,145.715 v1(108.059,146.858)
  Top Layer w0.2: v1@108.011,146.909 v1(108.059,146.858)
TX: pad.1@89.91,150.309 U4.41 | length 11.3
  Top Layer w0.2: v1@95.659,144.109 95.761,144.008 96.561,144.008 96.911,144.358 U4.41@97.333,144.359
  Inner1 w0.2: v1(90.16,149.809) 90.76,149.809 91.26,149.309 91.26,146.809 92.26,145.809 94.16,145.809 95.66,144.309 v1(95.66,144.109)
TX1+: U10.A2
TX1-: U10.A3
TX2+: U10.B2
TX2-: U10.B3
U2_1: C2.1 D2.1 U2.1 | length 1.7
  Top Layer w0.5: C2.1@91.005,139.109 91.359,139.108 91.661,139.408 U2.1@91.66,140.359
U2_4: R1.1 U2.4 | length 1.1
  Top Layer w0.15: R1.1@88.893,143.184 89.261,142.817 U2.4@89.26,142.259
U2_6: C2.2 D1.1 L4.2 U2.6 | length 1
  Top Layer w0.15: D1.1@88.46,136.609 89.286,136.609 L4.2@89.411,136.733
VCONN: SW2.3@111.26,138.193 U13.1 | length 21.3
  Top Layer w0.172: v1(111.26,137.15) SW2.3@111.26,138.039
  Inner2 w0.172: v1(95.631,140.399) 95.631,139.637 96.178,139.09 96.178,137.389 96.52,137.046 105.499,137.046 105.896,136.65 108.979,136.65 109.934,137.605 110.805,137.605 v1(111.26,137.15)
  Bottom Layer w0.172: U13.1@95.011,141.142 95.011,140.656 95.268,140.399 v1(95.631,140.399)
Z: 
pads on no net: SW2.1@109.26,138.193 U4.6 U4.7 U4.8 U4.10 U4.12 U4.25 U4.26 U4.27 U4.28 U4.29 U4.30 U4.31 U4.32 U4.33 U4.35 U4.44 U4.45 U4.47 U4.48 U5.2 U6.3 U7.A3 U7.B2 U7.C2 U13.3 USB5.A2 USB5.A3 USB5.A6 USB5.A7 USB5.A10 USB5.A11 USB5.B2 USB5.B3 USB5.B10 USB5.B11
copper on no net: | length 97.5
  Top Layer w0.15: v3@86.084,112.764 ccw(c86.084,112.841) 86.162,112.841 v3(86.162,112.876) ; 110.403,96.794 115.605,96.794
  Top Layer w1.2: v3(86.162,112.876) v3@109.19,112.876
  Inner1 w1.2: 86.162,113.13 109.19,113.13
  Inner2 w1.2: 86.162,113.13 109.19,113.13
  Bottom Layer w1.2: 86.162,113.13 109.19,113.13
  other v3: 86.835,112.876 87.509,112.876 88.184,112.876 88.858,112.876 89.538,112.876 90.212,112.876 90.88,112.876 91.554,112.876 92.228,112.876 92.902,112.876 93.582,112.876 94.256,112.876 94.927,112.876 95.601,112.876 96.276,112.876 96.95,112.876 97.63,112.876 98.304,112.876 98.974,112.876 99.647,112.876 100.322,112.876 100.996,112.876 101.676,112.876 102.35,112.876 103.022,112.876 103.696,112.876 104.371,112.876 105.045,112.876 105.725,112.876 106.399,112.876 107.076,112.876 107.75,112.876 108.425,112.876 109.098,112.876

## Polygon pours and split planes (outlines as drawn)
GND on Top Layer (solid, remove dead copper, pour order 16): 76.2,134.811 117.094,134.811 117.094,151.321 76.2,151.321
GND on Bottom Layer (solid, remove dead copper, pour order 28): 76.2,134.811 117.094,134.811 117.094,151.321 76.2,151.321
GND on Inner1 (solid, remove dead copper): 76.2,134.811 117.094,134.811 117.094,151.321 76.2,151.321
GND on Inner2 (solid, remove dead copper): 76.2,134.811 117.094,134.811 117.094,151.321 76.2,151.321
G on Inner2 (solid, remove dead copper): 76.201,112.029 117.095,112.029 117.095,128.539 76.201,128.539
G on Inner1 (solid, remove dead copper): 76.201,112.029 117.095,112.029 117.095,128.539 76.201,128.539
G on Top Layer (solid, remove dead copper, pour order 18): 76.201,112.029 117.095,112.029 117.095,128.539 76.201,128.539
G on Top Layer (solid, remove dead copper, pour order 20): 76.2,88.583 117.094,88.583 117.094,105.093 76.2,105.093
G on Bottom Layer (solid, remove dead copper, pour order 30): 76.201,112.029 117.095,112.029 117.095,128.539 76.201,128.539
G on Bottom Layer (solid, remove dead copper, pour order 32): 76.2,88.583 117.094,88.583 117.094,105.093 76.2,105.093
no net on Top Layer (solid, remove dead copper, pour order 22): 76.329,157.867 117.223,157.867 117.223,174.377 76.329,174.377
G on Bottom Layer (solid, remove dead copper, pour order 34): 76.329,157.74 117.223,157.74 117.223,174.25 76.329,174.25
U2_6 on Top Layer (solid, remove dead copper, pour order 0): 88.81,140.609 88.81,135.359 88.86,135.309 89.96,135.309 90.01,135.359 90.01,138.659 90.11,138.759 90.26,138.759 90.31,138.809 90.31,139.409 90.26,139.459 90.11,139.459 90.01,139.559 90.01,140.659 89.96,140.709 88.86,140.709 88.81,140.659
IN+ on Bottom Layer (solid, remove dead copper, pour order 24): 115.235,144.559 113.01,144.559 112.406,145.163 109.287,145.163 108.86,144.736 108.86,140.584 108.935,140.509 112.335,140.509 112.41,140.584 112.41,141.334 112.71,141.634 115.235,141.634 115.26,141.659 115.26,142.009 115.21,142.059 111.76,142.059 111.385,142.434 111.385,143.734 111.76,144.109 115.235,144.109 115.285,144.159 115.285,144.509
IN+ on Top Layer (solid, remove dead copper, pour order 2): 115.235,144.559 113.01,144.559 112.66,144.909 109.16,144.909 108.86,144.609 108.86,140.584 108.935,140.509 112.335,140.509 112.41,140.584 112.41,141.334 112.71,141.634 115.235,141.634 115.26,141.659 115.26,142.009 115.21,142.059 111.76,142.059 111.385,142.434 111.385,143.734 111.76,144.109 115.235,144.109 115.285,144.159 115.285,144.509
IN- on Top Layer (solid, remove dead copper, pour order 4): 82.66,144.509 84.66,144.509 84.86,144.709 85.16,145.009 87.96,145.009 88.46,144.509 88.46,141.909 88.66,141.709 89.66,141.709 89.76,141.609 89.76,141.009 89.66,140.909 88.66,140.909 88.46,140.709 88.46,140.309 88.36,140.209 86.96,140.209 86.76,140.009 86.76,139.509 86.66,139.409 85.26,139.409 85.16,139.509 85.16,141.309 85.01,141.459 82.66,141.459 82.585,141.534 82.585,141.884 82.66,141.959 82.66,144.409
IN- on Top Layer (solid, remove dead copper, pour order 6): 84.96,144.809 85.46,145.309 86.86,145.309 87.76,145.309 87.76,144.809
IN- on Bottom Layer (solid, remove dead copper, pour order 26): 82.685,141.459 85.01,141.459 85.16,141.309 85.16,135.409 85.56,135.009 112.06,135.009 112.56,135.509 112.56,138.709 112.36,138.909 107.76,138.909 107.36,139.309 89.46,139.309 88.76,140.009 88.76,145.009 88.46,145.309 85.46,145.309 84.66,144.509 82.66,144.509
IN+ on Top Layer (solid, remove dead copper, pour order 8): 113.685,144.559 108.86,144.509 108.86,144.884 109.235,145.259 112.61,145.259 113.31,144.559
Z on Top Layer (solid, remove dead copper, pour order 10): 80.36,137.684 80.36,134.784 85.31,134.784 85.31,137.684
Z on Top Layer (solid, remove dead copper, pour order 12): 88.66,138.209 88.66,135.009 93.06,135.009 93.16,134.909 93.16,138.209
IN- on Top Layer (solid, remove dead copper, pour order 14): 102.56,139.216 104.189,140.844 104.189,140.858 106.728,140.858 106.807,140.78 106.807,140.4 107.319,139.887 107.319,139.034 102.742,139.034

## Keep-outs
Board Outline Layer:
  lines w0.15: 76.36,114.069 76.36,115.692 76.541,115.692 77.126,115.692 77.519,115.3 77.82,114.999 79.823,114.999 79.823,125.286 77.724,125.286 77.131,124.692 76.54,124.692 76.361,124.692 76.361,126.427 cw(c78.361,126.427) 78.361,128.427 ; 76.36,136.85 76.36,138.473 76.541,138.473 ; 76.361,114.068 ccw(c78.361,114.068) 78.361,112.068 ; 76.361,136.849 ccw(c78.361,136.849) 78.361,134.849 ; 76.361,147.473 76.361,149.209 cw(c78.361,149.209) 78.361,151.209 ; 76.367,90.743 ccw(c78.367,90.743) 78.367,88.743 ; 76.367,103.103 cw(c78.367,103.103) 78.367,105.103 ; 76.369,90.743 76.369,101.622 76.369,103.103 ; 76.37,159.901 ccw(c78.37,159.901) 78.37,157.901 ; 76.37,172.26 cw(c78.37,172.26) 78.37,174.26 84.601,174.26 cw(c84.601,174.168) 84.667,174.233 84.05,173.616 ccw(c84.358,173.309) 83.923,173.309 83.923,171.912 83.923,170.515 ccw(c84.431,170.515) 84.431,170.007 cw(c84.431,169.294) 85.145,169.294 85.145,168.748 ccw(c85.688,168.748) 85.688,168.206 95.78,168.206 ccw(c95.78,168.748) 96.323,168.748 96.323,169.294 cw(c97.036,169.294) 97.036,170.007 ccw(c97.036,170.515) 97.544,170.515 97.544,171.912 ; 76.371,159.901 76.371,170.78 76.371,172.261 ; 76.381,138.473 76.54,138.473 ; 76.381,147.473 76.54,147.473 81.457,147.473 ; 78.32,128.427 115.044,128.467 ; 78.32,151.208 115.044,151.248 ; 78.329,88.743 115.019,88.705 ; 78.331,157.901 115.021,157.863 ; 78.375,105.104 115.099,105.065 ; 78.4,112.067 115.09,112.105 ; 78.4,134.849 115.09,134.887 ; 81.457,138.473 76.54,138.473 ; 97.546,171.912 cw(c97.551,171.917) 97.544,171.917 97.544,173.309 ccw(c97.11,173.309) 97.417,173.616 96.8,174.233 ccw(c96.825,174.258) 96.825,174.223 115.06,174.223 cw(c115.06,172.223) 117.06,172.223 117.06,170.488 117.06,161.487 117.061,159.864 cw(c115.06,159.863) 115.06,157.863 ; 115.052,112.105 ccw(c115.052,114.105) 117.052,114.105 ; 115.052,128.465 cw(c115.052,126.465) 117.052,126.465 ; 115.052,134.887 ccw(c115.052,136.887) 117.052,136.887 117.052,138.907 115.382,138.907 ; 115.052,151.246 cw(c115.052,149.246) 117.052,149.246 ; 115.058,88.706 ccw(c115.058,90.706) 117.058,90.706 ; 115.058,105.065 cw(c115.058,103.065) 117.058,103.065 117.058,101.33 117.058,92.33 117.059,90.707 ; 115.382,138.906 115.382,147.308 117.051,147.308 117.051,147.765 ; 117.051,114.105 117.051,116.059 116.217,116.059 115.431,115.273 112.562,115.273 112.562,113.533 84.612,113.533 84.612,114.999 81.915,114.999 81.915,125.286 84.611,125.286 84.611,127.052 112.562,127.052 112.562,125.533 115.21,125.533 116.217,124.527 117.051,124.527 117.051,124.984 ; 117.05,124.985 117.05,126.465 ; 117.05,147.766 117.05,149.246
Multi-Layer:
  region: 84.455,113.42 112.698,113.42 112.698,127.191 84.455,127.191
  region: 108.722,103.74 80.479,103.74 80.479,89.97 108.722,89.97
  circle w0.254: c92.76,147.628 r0.55
  circle w0.254: c88.96,147.628 r0.55
  circle w0.254: c105.935,149.859 r0.4
  circle w0.254: c107.635,149.859 r0.4
  circle w0.254: c100.515,149.859 r0.4
  circle w0.254: c102.215,149.859 r0.4

## Other copper
Top Layer:
  drawing of 251 lines, arcs and shapes, not listed